# Altium PCB main.PcbDoc
Units mm, origin at the board's own origin, x right, y up, seen from the top; angles counter-clockwise.
Board outline 55 x 30 mm, 2 copper layers (L1 Copper top, L2 Copper bottom), stack 1.07 mm thick; 52 components, 22 nets, 136 pads, 89 vias.
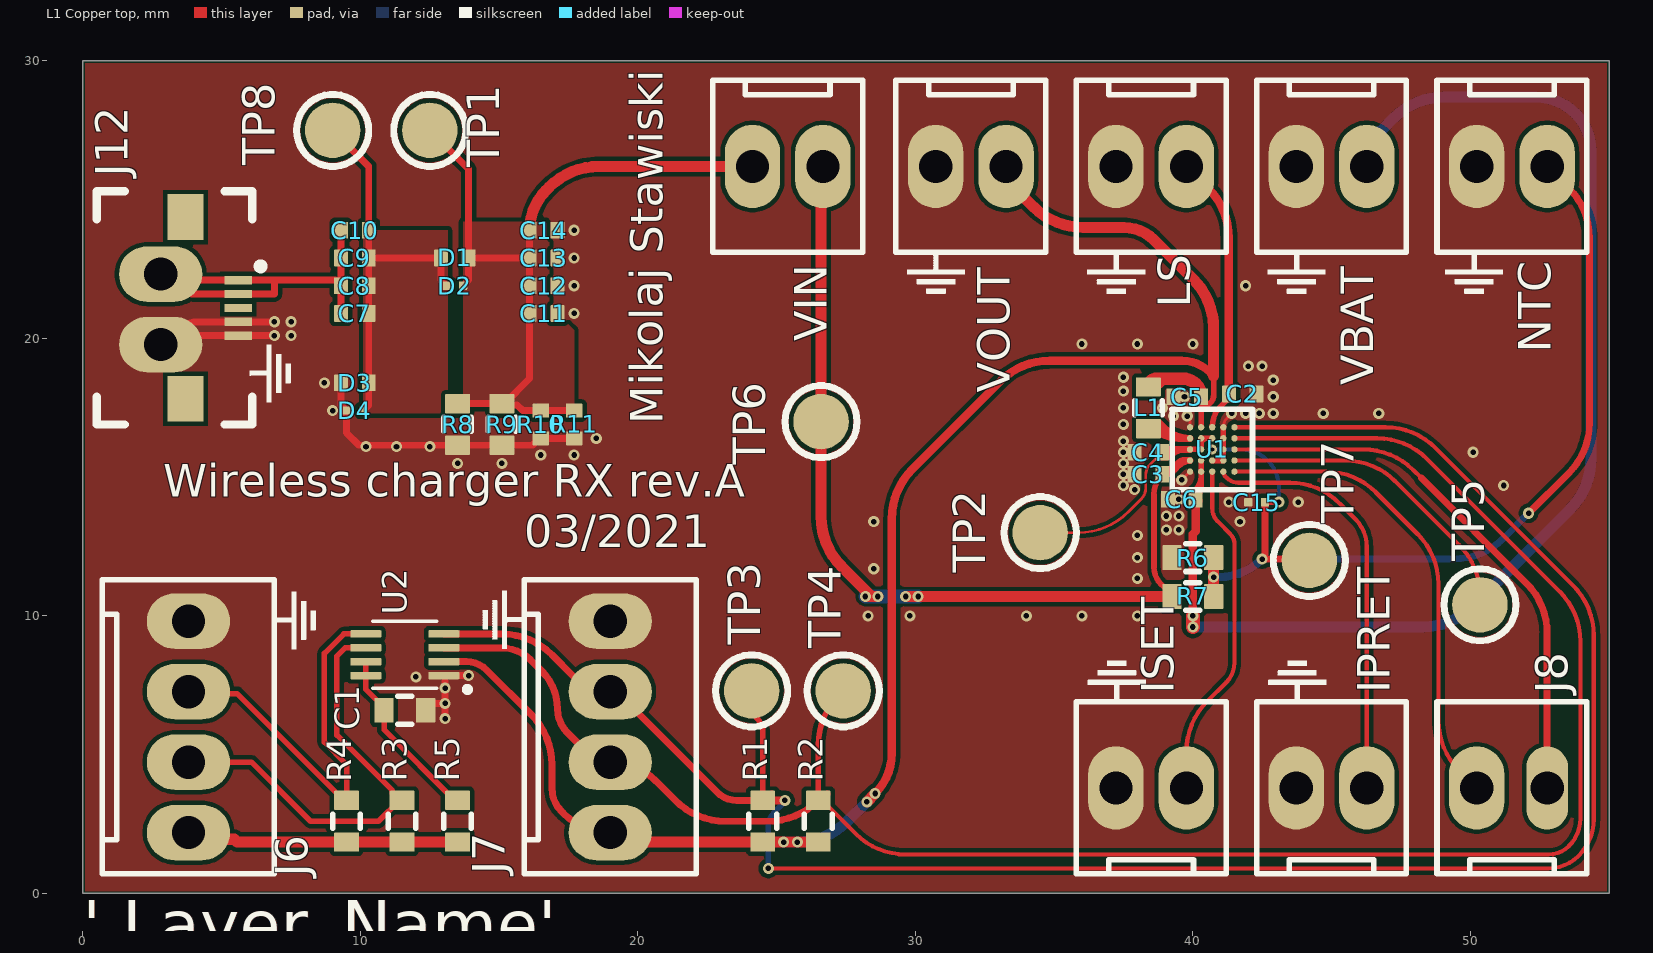
[diagram p0: L1 Copper top view]
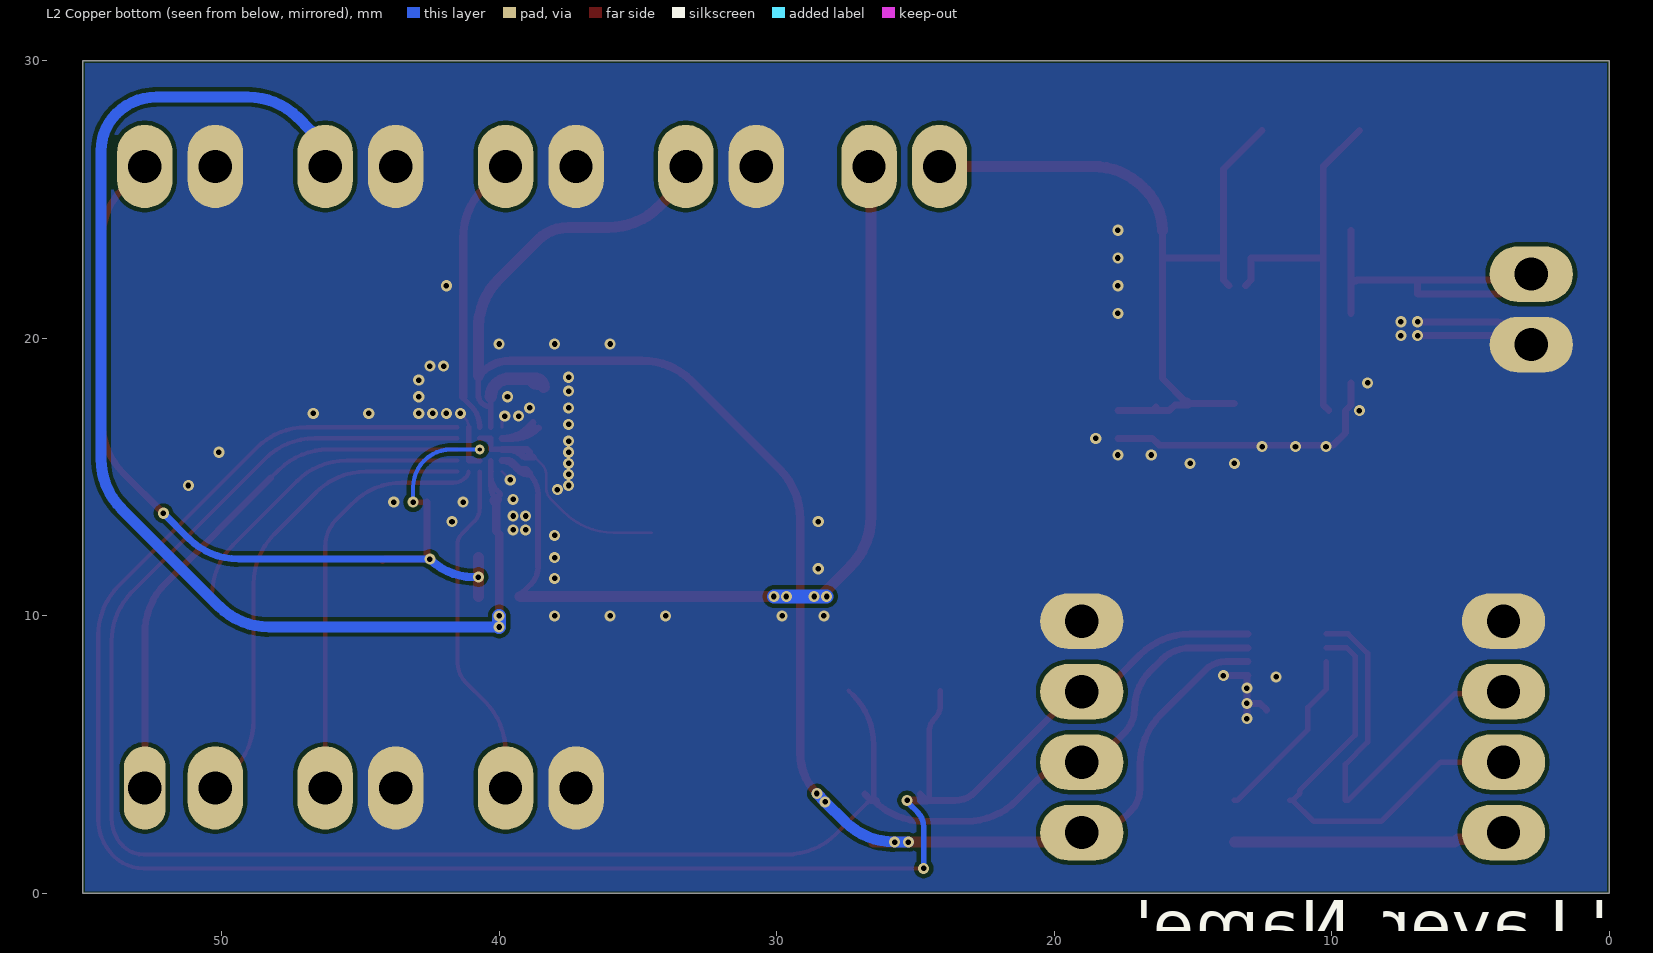
[diagram p1: L2 Copper bottom view, seen from below]

## Layer stack, top to bottom
Top Solder: solder mask 0.02, Solder Resist, Dk 3.5
L1 Copper top: signal copper 0.035
Dialectric FR4: dielectric 1, FR-4, Dk 4.8
L2 Copper bottom: signal copper 0.035
Bottom Solder: solder mask 0.02, Solder Resist, Dk 3.5

## Board outline
55,30 0,30 0,0 55,0

## Design rules (kind name [scope] priority, off if disabled: settings)
BoardOutlineClearance [All] p1: gap=0.076 ignorepadtopadclearanceinfootprint=FALSE
Clearance polygon_clearance [InPolygon] p1: gap=0.15 ignorepadtopadclearanceinfootprint=FALSE
Clearance [All] p2: gap=0.102 ignorepadtopadclearanceinfootprint=FALSE
HoleSize [All] p1: absolutevalues=TRUE maxlimit=3 minlimit=0.15 maxpercent=80.000 minpercent=20.000
HoleToHoleClearance [All] p1: gap=0 allowstackedmicrovias=FALSE
MinimumAnnularRing [All] p1: minimumring=0.1
MinimumSolderMaskSliver [All] p1: minsoldermaskwidth=0.025
PlaneClearance [All] p1: clearance=0.2
PlaneConnect [All] p1: planeconnectstyle=Relief reliefexpansion=0.15 reliefentries=4 reliefconductorwidth=0.1 reliefairgap=0.15
PolygonConnect [All] p1: connectstyle=Direct reliefconductorwidth=0.3 reliefentries=4 polygonreliefangle="90 Angle" airgapwidth=0.2
RoutingVias [All] p1: holewidth=0.15 width=0.4 viastyle="Through Hole" minholewidth=0.15 minwidth=0.3 maxholewidth=0.5 maxwidth=1.5
SilkToSilkClearance [All] p1: silktosilkclearance=0.05
SilkToSolderMaskClearance [IsPad] p1: minsilkscreentomaskgap=0 clearancetoexposedcopper=TRUE
SolderMaskExpansion [All] p1: expansion=0.102 istentingtop=FALSE
Width [All] p1: maxlimit=1 minlimit=0.051 preferedwidth=0.203 toplayer_prefwidth=0.076 bottomlayer_minwidth=0.102 minimp=50.000000 maximp=50.000000 favimp=50.000000
23 further rules are at their usual default settings.

## Components (designator, comment, footprint, x,y, rotation, side; value= is the part's Value field where it differs from the comment)
C1 "100nF" SMD_CAPACITOR_0603 11.6,6.6 r0 top
C2 "2.2uF" SMD_CAPACITOR_0402 41.8,18 r180 top
C3 "2.2uF" SMD_CAPACITOR_0402 38.4,15.1 r180 top
C4 "10uF" SMD_CAPACITOR_0402 38.4,15.9 r180 top
C5 "10uF" SMD_CAPACITOR_0402 39.8,17.9 r180 top
C6 "2.2uF" SMD_CAPACITOR_0402 39.6,14.2 r0 top
C7 "?" SMD_CAPACITOR_0402 9.8,20.9 r180 top
C8 "?" SMD_CAPACITOR_0402 9.8,21.9 r180 top
C9 "?" SMD_CAPACITOR_0402 9.8,22.9 r180 top
C10 "?" SMD_CAPACITOR_0402 9.8,23.9 r180 top
C11 "?" SMD_CAPACITOR_0402 16.6,20.9 r180 top
C12 "?" SMD_CAPACITOR_0402 16.6,21.9 r180 top
C13 "?" SMD_CAPACITOR_0402 16.6,22.9 r180 top
C14 "?" SMD_CAPACITOR_0402 16.6,23.9 r180 top
C15 "100nF" SMD_CAPACITOR_0201 42.3,14.1 r0 top
D1 "Fast Schottky 0402" CLP1006-2L 13.4,22.9 r0 top
D2 "Fast Schottky 0201" CLP0603-2M 13.4,21.9 r0 top
D3 "Fast Schottky 0402" CLP1006-2L 9.8,18.4 r0 top
D4 "Fast Schottky 0201" CLP0603-2M 9.8,17.4 r0 top
IPRET "" HEADER_2PIN_0022272021#1 45,3.8 r0 top
ISET "" HEADER_2PIN_0022272021#1 38.5,3.8 r0 top
J6 "I2C Translated" HEADER_4PIN_0022272041 3.8,6 r270 top
J7 "I2C 1V8" HEADER_4PIN_0022272041 19,6 r270 top
J8 "" HEADER_2PIN_0022272021#2 51.5,3.8 r0 top
J12 "Receiver Coil" FPC_5PIN_0545500571 5.6,21.1 r270 top
L1 "2.2uH" SMD_INDUCTOR_0603 38.4,17.5 r90 top
LS "LOAD SWITCH" HEADER_2PIN_0022272021#1 38.5,26.2 r180 top
NTC "NTC" HEADER_2PIN_0022272021#1 51.5,26.2 r180 top
R1 "10k" SMD_RESISTOR_0603 24.5,2.6 r270 top
R2 "10k" SMD_RESISTOR_0603 26.5,2.6 r270 top
R3 "1k" SMD_RESISTOR_0603 11.5,2.6 r270 top
R4 "1k" SMD_RESISTOR_0603 9.5,2.6 r270 top
R5 "200k" SMD_RESISTOR_0603 13.5,2.6 r270 top
R6 "10k" SMD_RESISTOR_0603 40,12.1 r180 top
R7 "10k" SMD_RESISTOR_0603 40,10.7 r0 top
R8 "?" SMD_RESISTOR_0603 13.5,16.9 r90 top
R9 "?" SMD_RESISTOR_0603 15.1,16.9 r90 top
R10 "?" SMD_RESISTOR_0402 16.5,16.9 r90 top
R11 "?" SMD_RESISTOR_0402 17.7,16.9 r90 top
TP1 "Testpoint" "Testpoint 2mm" 12.5,27.5 r0 top
TP2 "Testpoint" "Testpoint 2mm" 34.5,13 r0 top
TP3 "Testpoint" "Testpoint 2mm" 24.1,7.3 r0 top
TP4 "Testpoint" "Testpoint 2mm" 27.4,7.3 r0 top
TP5 "Testpoint" "Testpoint 2mm" 50.35,10.4 r0 top
TP6 "Testpoint" "Testpoint 2mm" 26.6,17 r0 top
TP7 "Testpoint" "Testpoint 2mm" 44.2,12 r0 top
TP8 "Testpoint" "Testpoint 2mm" 9,27.5 r0 top
U1 "BQ25125" BQ25125-DSBGA25 40.7,16 r90 top
U2 "LSF0102-Q1" 8-VSSOP 11.6,8.6 r180 top
VBAT "BATTERY" HEADER_2PIN_0022272021#1 45,26.2 r180 top
VIN "" HEADER_2PIN_0022272021#1 25.4,26.2 r180 top
VOUT "OUT" HEADER_2PIN_0022272021#1 32,26.2 r180 top

## Footprints (in the part's own frame and the unit in brackets; to place one, negate y for a bottom-side part, rotate by r counter-clockwise, add the part's x,y. Pads: shape width x height; smd on the part's side, far side on the other; paste and mask are expansions set on the pad)
8-VSSOP [mm] "8-VSSOP"
  rrect25% 1.12x0.27 smd: 1(-1.405,0.75) 2(-1.405,0.25) 3(-1.405,-0.25) 4(-1.405,-0.75) 5(1.405,-0.75) 6(1.405,-0.25) 7(1.405,0.25) 8(1.405,0.75)
  silkscreen extent -2.35,-1.2 1.15,1.35, body extent -1.55,-1 1.55,1, height 0.82
BQ25125-DSBGA25 [mm] "25-Pin DSBGA footprint for BQ25125"
  round 0.23 smd mask+0.05: A1(-0.8,0.8) A2(-0.4,0.8) A3(0,0.8) A4(0.4,0.8) A5(0.8,0.8) B1(-0.8,0.4) B2(-0.4,0.4) B3(0,0.4) B4(0.4,0.4) B5(0.8,0.4) C1(-0.8,0) C2(-0.4,0) C3(0,0) C4(0.4,0) C5(0.8,0) D1(-0.8,-0.4) D2(-0.4,-0.4) D3(0,-0.4) D4(0.4,-0.4) D5(0.8,-0.4) E1(-0.8,-0.8) E2(-0.4,-0.8) E3(0,-0.8) E4(0.4,-0.8) E5(0.8,-0.8)
  body extent -1.23,-1.26 1.23,1.27, height 0.5
CLP0603-2M [mm]
  rrect20% 0.3x0.3 smd paste-0.015 mask+0.06: 1(-0.3,0) 2(0.3,0)
  body extent -0.3,-0.15 0.31,0.16, height 0.27
CLP1006-2L [mm]
  rrect10% 0.5x0.6 smd paste-1 mask+0.06: 1(-0.5,0) 2(0.5,0)
  body extent -0.5,-0.3 0.51,0.31, height 0.27
FPC_5PIN_0545500571 [mm]
  rect 0.3x1 smd paste-0.06 mask+0.07: 1(-1,0) 2(-0.5,0) 3(0,0) 4(0.5,0) 5(1,0)
  rect 1.65x1.3 smd paste-0.2 mask+0: ""(-3.275,-1.9) ""(3.275,-1.9)
  silkscreen extent -4.2,-5.1 4.2,0.93, body extent -3.85,-4.8 3.85,0.2, height 1.2
HEADER_2PIN_0022272021#1 [mm]
  oval 2x3 hole 1.2: 1(-1.27,0) 2(1.27,0)
  silkscreen extent -2.7,-3.1 2.7,3.1, body extent -2.54,-2.9 2.54,2.9, height 11.7
HEADER_2PIN_0022272021#2 [mm]
  oval 2x3 hole 1.2: 1(-1.27,0)
  oval 1.5x3 hole 1.2: 2(1.27,0)
  silkscreen extent -2.7,-3.1 2.7,3.1, body extent -2.54,-2.9 2.54,2.9, height 11.7
HEADER_4PIN_0022272041 [mm]
  oval 2x3 hole 1.2: 1(-3.81,0) 2(-1.27,0) 3(1.27,0) 4(3.81,0)
  silkscreen extent -5.3,-3.1 5.3,3.1, body extent -5.08,-2.9 5.08,2.9, height 11.7
SMD_CAPACITOR_0201 [mm]
  rrect20% 0.3x0.3 smd paste-0.015 mask+0.06: 1(-0.3,0) 2(0.3,0)
  body extent -0.3,-0.15 0.3,0.15, height 0.3
SMD_CAPACITOR_0402 [mm]
  rrect10% 0.5x0.6 smd paste-1 mask+0.06: 1(-0.5,0) 2(0.5,0)
  body extent -0.5,-0.26 0.5,0.26, height 0.54
SMD_CAPACITOR_0603 [mm]
  rrect10% 0.7x0.9 smd paste-1 mask+0.08: 1(-0.75,0) 2(0.75,0)
  silkscreen extent -0.25,-0.5 0.25,0.5, body extent -0.8,-0.39 0.8,0.43, height 0.86
SMD_INDUCTOR_0603 [mm]
  rrect10% 0.7x0.9 smd paste-1 mask+0.06: 1(-0.75,0) 2(0.75,0)
  silkscreen extent -0.25,-0.5 0.25,0.5, body extent -0.8,-0.4 0.8,0.4, height 0.9
SMD_RESISTOR_0402 [mm]
  rrect10% 0.5x0.6 smd paste-1 mask+0.06: 1(-0.5,0) 2(0.5,0)
  body extent -0.5,-0.25 0.5,0.25, height 0.35
SMD_RESISTOR_0603 [mm]
  rrect10% 0.7x0.9 smd paste-1 mask+0.08: 1(-0.75,0) 2(0.75,0)
  silkscreen extent -0.25,-0.5 0.25,0.5, body extent -0.8,-0.39 0.8,0.41, height 0.45
"Testpoint 2mm" [mm]
  round 2 smd: 1(0,0)
  silkscreen extent -1.3,-1.3 1.3,1.3

## Part data
C1: library part CAPACITOR_0603, "Capacitor SMT 0603", Device Package="0603 (1608 Metric)", Mounting Type=SMT, Size / Dimension="0.063\" L x 0.031\" W (1.60mm x 0.80mm)"
C2 C3 C6: library part CAPACITOR_0402, "Ceramic Capacitor 2.2uF 20% 6.3V X5R 0402", Device Package="0402 (1005 Metric)", Manufacturer=Murata, Part Number=GRM155R60J225ME15D, Tolerance=20%, Voltage - Rated=6.3V, Distributor link 1=https://www.digikey.com.au/product-detail/en/murata-electronics/GRM155R60J225ME15D/490-4519-1-ND/1033278, Mounting Type=SMT, Size / Dimension="0.039\" L x 0.020\" W (1.00mm x 0.50mm)"
C4 C5: library part CAPACITOR_0402, "Ceramic Capacitor 10uF 20% 10V X5R 0402", Device Package="0402 (1005 Metric)", Manufacturer=Samsung, Part Number=CL05A106MP5NUNC, Tolerance=20%, Voltage - Rated=10V, Distributor link 1=https://www.digikey.com/en/products/detail/samsung-electro-mechanics/CL05A106MP5NUNC/3887108?s=N4IgTCBcDaIMIBkAMBWAggRiQNgLIAUUA5AVSLhAF0BfIA, Mounting Type=SMT, Size / Dimension="0.039\" L x 0.020\" W (1.00mm x 0.50mm)"
C7 C8 C9 C10 C11 C12 C13 C14: library part CAPACITOR_0402, "Ceramic Capacitor 10V X5R 0402", Device Package="0402 (1005 Metric)", Voltage - Rated=10V, Manufacturer=?, Mounting Type=SMT, Part Number=?, Size / Dimension="0.039\" L x 0.020\" W (1.00mm x 0.50mm)"
C15: library part CAPACITOR_0201, "Capacitor SMT 0201", Device Package="0201 (0603 Metric)", Mounting Type=SMT, Size / Dimension="0.024\" L x 0.012\" W (0.60mm x 0.30mm)"
D1 D3: library part DIODE_0402, "Diode SMT 0402", Device Package="0402 (1005 Metric)", Manufacturer=Vishay, Part Number=VSKY05301006, Distributor link 1=https://www.digikey.com/en/products/detail/vishay-general-semiconductor-diodes-division/VSKY05301006-G4-08/7390852, Mounting Type=SMT, Size / Dimension="0.039\" L x 0.020\" W (1.00mm x 0.50mm)"
D2 D4: library part DIODE_0201, "Diode SMT 0201", Device Package="0201 (0603 Metric)", Manufacturer=Vishay, Part Number=VSKY02300603, Distributor link 1=https://www.digikey.com/en/products/detail/vishay-general-semiconductor-diodes-division/VSKY02300603-G4-08/7390849, Mounting Type=SMT, Size / Dimension="0.024\" L x 0.012\" W (0.60mm x 0.30mm)"
IPRET ISET J8 LS NTC VBAT VIN VOUT: library part CONN_2PIN, "Connector 2-pin generic"
J6 J7: library part CONN_4PIN, "Connector 4-pin generic"
J12: library part CONN_FPC_5PIN, "FPC connector 5-pin generic"
L1: library part INDUCTOR_0603, "Inductor fixed 2.2uH 20% 500mA 180mOhm 0603", Device Package="0603 (1608 Metric)", Manufacturer=TDK, Part Number=MLZ1608N2R2LT000, Tolerance=20%, Distributor link 1=https://www.digikey.com.au/product-detail/en/tdk-corporation/MLZ1608N2R2LT000/445-6754-1-ND/2523575, Mounting Type=SMT, Size / Dimension="0.063\" L x 0.031\" W (1.60mm x 0.80mm)"
R1 R2 R3 R4 R5 R6 R7 R8 R9: library part RESISTOR_0603, "Resistor SMT 0603", Device Package="0603 (1608 Metric)", Mounting Type=SMT, Size / Dimension="0.063\" L x 0.031\" W (1.60mm x 0.80mm)"
R10 R11: library part RESISTOR_0402, "Resistor SMT 0402", Device Package="0402 (1005 Metric)", Mounting Type=SMT, Size / Dimension="0.039\" L x 0.020\" W (1.00mm x 0.50mm)"
TP1 TP2 TP3 TP4 TP5 TP6 TP7 TP8: "Testpoint for measuring at the PCB"
U1: "BQ25125 Low IQ Highly Integrated Battery Charge Management Solution For Wearables and IoT", Manufacturer=TI, Distributor link 1=https://www.digikey.com/en/products/detail/texas-instruments/BQ25125YFPR/10273214, Link=https://www.ti.com/product/BQ25125, Mounting Type=SMT, Part Number=BQ25125
U2: "Automotive 2-Channel Auto Bidirectional Multi-Voltage Level Translator", Device Package=8-VSSOP, Manufacturer=TI, Operating Temperature="-40°C ~ 125°C", Package / Case="8-VFSOP (0.091\"\", 2.30mm Width)", Part Number=LSF0102QDCURQ1, Distributor link 1=https://www.digikey.com/en/products/detail/texas-instruments/LSF0102QDCURQ1/9343347?s=N4IgTCBcDaIDIGUBiAGAjCsBFAIgYQFUAlLNEAXQF8g, Link=https://www.ti.com/product/LSF0102-Q1, Mounting Type=SMT

## Free pads (board coordinates)
  oval 3x2 hole 1.2: 1(2.8,22.32) 2(2.8,19.78)

## Via types
v1: diameter 0.4, hole 0.2, L1 Copper top to L2 Copper bottom, 88 vias
v2: diameter 0.356, hole 0.15, L1 Copper top to L2 Copper bottom, 1 vias

## Nets (pads, with @x,y where several pads share a name; then routed paths per layer and width w, separated by ;. In a path a pad name is that pad's centre, name@x,y a point inside that pad or via, vN(x,y) a via of type N, cw(c..) or ccw(c..) an arc to the next point about the centre after c; other vN are vias at no path point)
1V8: C5.1 J7.4 L1.2 R1.2 R2.2 U1.B5 U2.2 VOUT.1 | length 65.6
  L1 Copper top w0.1: L1.2 cw(c38.55,18.25) L1.2@38.55,18.4
  L1 Copper top w0.2: L1.2 38.65,18.25 ccw(c38.65,18.55) 38.95,18.55 ; U1.B5 40.3,17.559 ; C5.1 40.3,17.559 ; 40.75,18.65 40.75,17.95 cw(c40.388,17.95) 40.644,17.694 40.6,17.65 cw(c40.38,17.87) 40.38,17.559 40.3,17.559
  L1 Copper top w0.25: U2.2 13.826,8.35 cw(c13.826,7.326) 14.55,8.05 16.156,6.444 cw(c14.36,4.648) 16.9,4.648 16.9,3.795 ccw(c18.095,3.795) 17.25,2.95 17.31,2.89 ccw(c19,4.58) J7.4 J7.4@18.026,2.19
  L1 Copper top w0.3: v1(28.55,3.6) ccw(c27.101,5.049) 29.15,5.049 29.15,13.498 cw(c31.69,13.498) 29.894,15.294 33.056,18.456 cw(c34.852,16.66) 34.852,19.2 39.6,19.2 cw(c39.6,17.751) 40.624,18.776 40.75,18.65
  L1 Copper top w0.4: J7.4@19.29,1.9 J7.4 ccw(c19.821,3.011) 19.821,1.85 R1.2 v1(25.25,1.85) v1(25.75,1.85) R2.2 ; v1(28.25,3.3) v1(28.55,3.6) ; VOUT.1 ccw(c34.405,26.2) 33.602,25.398 34.256,24.744 ccw(c36.052,26.54) 36.052,24 37.514,24 cw(c37.514,22.464) 38.6,23.55 40.006,22.144 cw(c38.21,20.348) 40.75,20.348 40.75,18.65
  L1 Copper top w0.45: L1.2 cw(c38.7,18.25) 38.7,18.55 39.65,18.55 cw(c39.65,17.9) C5.1
  L2 Copper bottom w0.4: v1(25.25,1.85) v1(25.75,1.85) ccw(c25.75,4.385) 27.542,2.592 v1(28.25,3.3) v1(28.55,3.6)
GND: C1.2 C2.1 C3.2 C4.2 C5.2 C6.1 C11.1 C12.1 C13.1 C14.1 C15.1 D3.1 D4.1 IPRET.1 ISET.1 J6.1 J7.1 J12.4 J12.5 LS.2 NTC.2 pad.2 R6.2 R8.1 R9.1 R10.1 R11.1 U1.A1 U1.A5 U1.C2 U1.D2 U1.D3 U1.D4 U1.D5 U2.1 VBAT.2 VOUT.2 | length 24.9
  L1 Copper top w0.1: v1(39.6,14.9) U1.A1 ; v1(39.8,17.2) cw(c39.559,16.959) 39.9,16.959 U1.A5
  L1 Copper top w0.102: U1.D5 cw(c41.583,16.8) 41.241,17.141 v1(41.4,17.3)
  L1 Copper top w0.2: U1.C2 40.9,15.6 ; 41.1,15.8 cw(c40.9,15.8) 40.9,15.6 ; U1.D5 U1.D4 U1.D3 U1.D2 40.9,15.6
  L1 Copper top w0.25: v1(6.9,20.1) J12.5 3.62,20.1 ccw(c3.62,19.78) 3.3,19.78 cw(c4.12,19.78) 4.12,20.6 J12.4 v1(6.9,20.6) ; D3.1 9.3,17.6 D4.1 9.5,16.6 9.95,16.15 R8.1 R9.1 16.2,16.15 16.45,16.4 R10.1 R11.1 ; C1.2 12.35,6.625 12.575,6.85 v1(13.05,6.85) ; U2.1 U2.1@13.04,7.85 ; v1(13.05,6.3) v1(13.05,6.85) ; v1(13.9,7.85) U2.1@13.04,7.85 ; U2.1@13.04,7.85 13.05,7.84 v1(13.05,7.4) v1(13.05,6.85)
  other v1: 12,7.8 28.3,10 29.8,10 34,10 36,10 38,10 38,11.35 28.5,11.7 38,12.1 38,12.9 39.05,13.1 39.5,13.1 28.5,13.4 41.7,13.4 39.05,13.6 39.5,13.6 41.3,14.1 43.8,14.1 39.5,14.2 37.9,14.55 37.5,14.7 51.2,14.7 37.5,15.1 13.5,15.5 15.1,15.5 37.5,15.5 16.5,15.8 17.7,15.8 37.5,15.9 50.1,15.9 10.2,16.1 11.3,16.1 12.5,16.1 37.5,16.3 18.5,16.4 37.5,16.9 39.3,17.2 41.9,17.3 42.4,17.3 42.9,17.3 44.7,17.3 46.7,17.3 9,17.4 37.5,17.5 38.9,17.5 39.7,17.9 42.9,17.9 37.5,18.1 8.7,18.4 42.9,18.5 37.5,18.6 42,19 42.5,19 36,19.8 38,19.8 40,19.8 7.5,20.1 7.5,20.6 17.7,20.9 17.7,21.9 41.9,21.9 17.7,22.9 17.7,23.9
NetC1_1: C1.1 R5.1 U2.7 U2.8 | length 6.4
  L1 Copper top w0.2: U2.7 U2.8 10.195,7.355 10.85,6.7 C1.1 10.85,5.9 13.4,3.35 R5.1
NetC2_2: C2.2 LS.1 U1.C5 | length 10.1
  L1 Copper top w0.2: U1.C5 40.7,16.826 cw(c41.724,16.826) 41,17.55 41.265,17.815 ccw(c41.179,17.9) C2.2@41.3,17.9
  L1 Copper top w0.3: LS.1 40.556,25.414 cw(c38.76,23.618) 41.3,23.618 C2.2@41.3,17.9
NetC7_1: C7.1 C8.1 C9.1 C10.1 D1.1 D2.1 D3.2 D4.2 TP8.1 | length 14.4
  L1 Copper top w0.25: TP8.1 10.3,26.2 C10.1 C9.1 ; D4.2 10.3,17.6 D3.2 C7.1 C8.1 C9.1 ; D2.1 12.9,22.1 D1.1 C9.1
NetC7_2: C7.2 C8.2 C9.2 C10.2 J12.1 J12.2 pad.1 | length 13.7
  L1 Copper top w0.25: C7.2 C8.2 C8.2@9.3,21.95 ; C10.2 C9.2 C8.2@9.3,21.95 ; 6.9,22.1 6.9,21.6 J12.2 4.02,21.6 cw(c4.02,22.32) 3.3,22.32 ccw(c3.52,22.32) 3.52,22.1 J12.1 6.9,22.1 ; 6.9,22.1 9.1,22.1 9.125,22.075 9.175,22.075 C8.2@9.3,21.95
NetC11_2: C11.2 C12.2 C13.2 C14.2 D1.2 D2.2 R8.2 R9.2 R10.2 R11.2 TP1.1 VIN.2 | length 29
  L1 Copper top w0.25: TP1.1 13.9,26.1 D1.2 ; R8.2 R9.2 ; D2.2 13.9,22.1 D1.2 ; R9.2@15.2,17.65 16.1,18.55 C11.2 C12.2 C13.2 ; R9.2@15.2,17.75 R9.2 ; C14.2 C13.2 ; R10.2@16.325,17.525 R10.2@16.45,17.4 ; R11.2 R10.2 R10.2@16.45,17.4 ; D1.2 C13.2 ; R9.2 15.15,17.6 15.65,17.6 15.85,17.4 R10.2@16.45,17.4
  L1 Copper top w0.4: C14.2 cw(c18.152,23.9) 16.701,25.351 16.806,25.456 cw(c18.602,23.66) 18.602,26.2 VIN.2
NetC15_2: C15.2 NTC.1 R6.1 R7.2 TP7.1 U1.C3 | length 36.5
  L1 Copper top w0.1: R6.1 R6.1@40.75,12.2
  L1 Copper top w0.2: C15.2 v1(43.1,14.1)
  L1 Copper top w0.25: C15.2 42.6,12.291 cw(c42.259,12.291) v1(42.5,12.05) 44.079,12.05 cw(c44.079,11.879) TP7.1 ; v1(52.1,13.7) 53.556,15.156 ccw(c51.76,16.952) 54.3,16.952 54.3,23.618 ccw(c51.76,23.618) 53.556,25.414 NTC.1 ccw(c54.146,26.2) NTC.1@53.173,25.227
  L1 Copper top w0.4: R7.2 v1(40.75,11.4) R6.1
  L2 Copper bottom w0.15: v2(40.7,16) 41.734,16 cw(c41.734,14.634) 42.7,15.6 cw(c41.734,14.634) 43.1,14.634 v1(43.1,14.1)
  L2 Copper bottom w0.25: v1(42.5,12.05) 49.398,12.05 ccw(c49.398,14.59) 51.194,12.794 v1(52.1,13.7)
  L2 Copper bottom w0.3: v1(40.75,11.4) 40.931,11.4 ccw(c40.931,13.619) v1(42.5,12.05)
NetIPRET_2: IPRET.2 U1.D1 | length 15.2
  L1 Copper top w0.15: U1.D1 ccw(c41.341,15.2) 41.171,15.029 41.223,14.977 ccw(c41.65,15.404) 41.65,14.8 43.498,14.8 cw(c43.498,12.26) 45.294,14.056 45.85,13.5 cw(c44.836,12.486) 46.27,12.486 IPRET.2
NetISET_2: ISET.2 U1.C1 | length 12.2
  L1 Copper top w0.15: ISET.2 39.77,5.118 cw(c42.31,5.118) 40.514,6.914 41.206,7.606 ccw(c40.496,8.316) 41.5,8.316 41.5,12.6 ccw(c41.017,12.6) 41.359,12.941 40.9,13.4 cw(c41.383,13.883) 40.7,13.883 U1.C1
NetJ6_2: J6.2 R4.1 U2.5 | length 14.7
  L1 Copper top w0.2: J6.2 3.87,7.2 5.55,7.2 9.4,3.35 R4.1 9.5,4.65 8.7,5.45 8.7,8.65 9.4,9.35 U2.5
NetJ6_3: J6.3 R3.1 U2.6 | length 16.2
  L1 Copper top w0.2: J6.3 6.07,4.73 8.2,2.6 10.65,2.6 R3.1@11.4,3.35 ; U2.6 9.45,8.85 9.15,8.55 9.15,5.7 11.15,3.7 11.15,3.6 R3.1@11.4,3.35 ; R3.1 R3.1@11.4,3.35
NetJ6_4: J6.4 R3.2 R4.2 R5.2 | length 9.8
  L1 Copper top w0.4: J6.4 4.04,1.95 5.45,1.95 5.55,1.85 R4.2 R3.2 R5.2
NetJ7_2: J7.2 R1.1 TP3.1 U1.E5 U2.4 | length 76.5
  L1 Copper top w0.15: R1.1 R1.1@24.6,3.35 ; v1(24.7,0.9) 25.7,0.9 52.814,0.9 ccw(c52.814,2.436) 53.9,1.35 ccw(c52.572,2.678) 54.45,2.678 54.45,9.298 ccw(c51.91,9.298) 53.706,11.094 48.744,16.056 ccw(c46.948,14.26) 46.948,16.8 U1.E5
  L1 Copper top w0.2: J7.2@18.5,7.27 J7.2 ; TP3.1 24.1,6.783 ccw(c24.783,6.783) 24.3,6.3 cw(c23.817,5.817) 24.5,5.817 R1.1
  L1 Copper top w0.25: U2.4 15.098,9.35 cw(c15.098,6.81) 16.894,8.606 17.686,7.814 ccw(c19,9.129) J7.2 ; J7.2@19.335,6.935 J7.2 ; J7.2@19.392,7.108 ccw(c19,6.715) J7.2 ; J7.2@19.393,7.107 22.862,3.638 ccw(c23.557,4.333) 23.557,3.35 R1.1 24.6,3.35 R1.1@24.825,3.575
  L1 Copper top w0.3: R1.1@24.6,3.35 v1(25.3,3.35)
  L2 Copper bottom w0.2: v1(24.7,0.9) 24.7,2.4 cw(c25.424,2.4) 24.912,2.912 25.265,3.265 ccw(c25.179,3.35) v1(25.3,3.35)
NetJ7_3: J7.3 R2.1 TP4.1 U1.E4 U2.3 | length 74.7
  L1 Copper top w0.15: R2.1 cw(c26.5,2.988) 26.756,3.244 27.856,2.144 ccw(c29.652,3.94) 29.652,1.4 52.826,1.4 ccw(c52.826,2.424) 53.55,1.7 ccw(c52.545,2.705) 53.966,2.705 53.966,9.082 ccw(c51.426,9.082) 53.222,10.878 48.444,15.656 ccw(c46.648,13.86) 46.648,16.4 U1.E4 ; TP4.1@27.244,7.144 TP4.1
  L1 Copper top w0.2: J7.3@18.07,4.73 J7.3 ; R2.1 26.5,5.348 cw(c29.04,5.348) TP4.1@27.244,7.144
  L1 Copper top w0.25: U2.3 15.064,8.85 cw(c15.064,7.314) 16.15,8.4 16.534,8.016 cw(c15.169,6.65) 17.1,6.65 ccw(c18.307,6.65) 17.453,5.797 18.181,5.069 ccw(c19,5.889) J7.3 ; J7.3@18.607,4.893 ccw(c19,5.285) J7.3 ; J7.3@19.785,4.73 J7.3 ; R2.1@26.4,3.35 R2.1 ; R2.1@26.825,3.575 26.6,3.35 R2.1 ; J7.3 cw(c19,2.388) 20.656,4.044 21.356,3.344 ccw(c23.152,5.14) 23.152,2.6 24.698,2.6 ccw(c24.698,5.14) 26.494,3.344 R2.1
NetJ8_1: J8.1 U1.E1 | length 17.2
  L1 Copper top w0.15: U1.E1 42.557,15.2 44.798,15.2 cw(c44.798,12.66) 46.594,14.456 48.106,12.944 cw(c46.31,11.148) 48.85,11.148 48.85,6.232 ccw(c51.39,6.232) 49.594,4.436 J8.1
NetJ8_2: J8.2 U1.E3 | length 20
  L1 Copper top w0.15: U1.E3 46.148,16 cw(c46.148,13.46) 47.944,15.256 48.236,14.964
  L1 Copper top w0.25: 48.236,14.964 52.026,11.174 cw(c50.23,9.378) 52.77,9.378 J8.2
NetTP5_1: TP5.1 U1.E2 | length 11.6
  L1 Copper top w0.15: U1.E2 45.498,15.6 cw(c45.498,13.06) 47.294,14.856 49.606,12.544 cw(c47.81,10.748) 50.35,10.748 TP5.1
PMID: C4.1 TP2.1 U1.A3 U1.B3 U1.B4 U1.C4 | length 9.8
  L1 Copper top w0.102: TP2.1 35.875,13 ccw(c35.875,15.54) 37.671,13.744 38.151,14.224 ccw(c37.783,14.592) 38.303,14.592 38.303,15.088 cw(c38.824,15.088) 38.456,15.456 C4.1
  L1 Copper top w0.15: C4.1@38.725,15.675 38.9,15.85 C4.1
  L1 Copper top w0.2: U1.A3 U1.B3 40.3,16.2 ; U1.C4 40.5,16.4 ; 40.3,16.2 cw(c40.5,16.2) 40.5,16.4 ; 40.3,16.2 U1.B4 40.5,16.4
  L1 Copper top w0.25: C4.1@38.777,15.726 39.021,15.726 ccw(c39.021,15.979) 39.2,15.8 cw(c39.683,15.317) 39.683,16 ; C4.1 39,16 39.683,16 ; U1.A3 39.683,16
SW: L1.1 U1.A4 | length 3.7
  L1 Copper top w0.25: L1.1@38.589,16.77 ccw(c39.483,17.663) 39.483,16.4 39.658,16.4 ; L1.1@38.731,16.784 ccw(c39.658,17.71) 39.658,16.4 ; L1.1@38.781,16.969 38.962,16.789 ccw(c39.9,17.727) U1.A4 39.658,16.4
VBAT: C6.2 U1.B1 U1.B2 VBAT.1 | length 46.2
  L1 Copper top w0.1: U1.B1@40.295,15.205 U1.B1
  L1 Copper top w0.2: C6.2@39.956,14.344 cw(c40.105,14.344) 39.999,14.449 40.1,14.55 ccw(c39.617,15.033) 40.3,15.033 ; C6.2 ccw(c39.617,14.683) 40.3,14.683 40.3,15.033 ; U1.B1@40.295,15.205 40.3,15.21 U1.B2 ; U1.B1 40.3,15.033
  L1 Copper top w0.3: v1(40,10) 40,12.95 40.1,13.05 C6.2
  L1 Copper top w0.4: C6.2 C6.2@40.15,14.15
  L1 Copper top w0.5: v1(40,9.6) v1(40,10)
  L2 Copper bottom w0.4: v1(40,9.6) 48.298,9.6 ccw(c48.298,12.14) 50.094,10.344 53.606,13.856 ccw(c51.81,15.652) 54.35,15.652 54.35,26.772 ccw(c52.472,26.772) 53.8,28.1 ccw(c52.351,26.651) 52.351,28.7 49.052,28.7 ccw(c49.052,26.16) 47.256,27.956 46.814,27.514 ccw(c48.129,26.2) VBAT.1
  L2 Copper bottom w0.5: v1(40,9.6) v1(40,10)
VIN: C3.1 R7.1 TP6.1 U1.A2 VIN.1 | length 35.9
  L1 Copper top w0.15: 39.18,15.275 39.449,15.543 cw(c39.701,15.291) 39.701,15.648
  L1 Copper top w0.152: C3.1@38.9,15.05 C3.1 ; R7.1@39.179,10.871 cw(c39.009,10.7) R7.1
  L1 Copper top w0.2: C3.1 ccw(c39.624,14.376) 38.6,14.376 38.6,11.754 ccw(c39.454,11.754) 38.85,11.15 R7.1@39.215,10.785 ; R7.1@39.215,10.785 cw(c39.129,10.7) R7.1
  L1 Copper top w0.25: VIN.1@26.585,26.115 VIN.1 ; 39.336,15.275 cw(c38.913,15.697) 38.913,15.1 C3.1 38.9,15.15 39.025,15.275 39.18,15.275 39.336,15.275 ; 39.336,15.275 39.492,15.431 ; 39.492,15.431 cw(c39.9,15.022) U1.A2 39.661,15.6 39.492,15.431
  L1 Copper top w0.4: VIN.1@26.585,26.115 cw(c26.549,26.079) 26.6,26.079 TP6.1 26.6,13.577 ccw(c29.14,13.577) 27.344,11.781 28.425,10.7 ; v1(28.2,10.7) 28.425,10.7 ; v1(28.65,10.7) 28.425,10.7 ; v1(29.65,10.7) v1(30.1,10.7) R7.1
  L2 Copper bottom w0.5: v1(28.2,10.7) v1(28.65,10.7) v1(29.65,10.7) v1(30.1,10.7)
pads on no net: J12. J12.3

## Polygon pours and split planes (outlines as drawn)
GND on L1 Copper top "GND_L01_P005" (solid, remove dead copper, pour order 5): 0,30 55,30 55,0 0,0
NetC7_1 on L1 Copper top "NETC7_1_L01_P003" (solid, remove dead copper, pour order 3): 10.3,23.9 13.15,23.9 13.15,17.3 10.2,17.3 10.1,17.4 10.1,23.7
NetC11_2 on L1 Copper top "NETC11_2_L01_P001" (solid, remove dead copper, pour order 1): 13.7,17.6 15.65,17.6 15.85,17.4 17.7,17.4 17.7,20.3 17.1,20.9 17.1,23.9 16.8,24.2 13.7,24.2
GND on L2 Copper bottom "GND_L02_P000" (solid, remove dead copper, pour order 0): 0,30 55,30 55,0 0,0

## Other copper
L1 Copper top:
  pour cut-out: 39.9,16.8 41.5,16.8 41.5,15.2 39.9,15.2
  text "'.Layer_Name'" at 0.002,-2.581 h3
L2 Copper bottom:
  text "'.Layer_Name'" at 0.002,-2.581 h3

## Silkscreen, mask and mechanical layers (free items; w line width, h text height)
Top Overlay:
  drawing of 31 lines, arcs and shapes, not listed
  text "Mikolaj Stawiski" at 21.3,16.901 h2 r90
  text "Wireless charger RX rev.A" at 2.9,13.9 h2
  text "03/2021" at 15.9,12.079 h2
  text "'.Layer_Name'" at 0,-2.581 h3
Bottom Overlay:
  text "'.Layer_Name'" at 0.002,-2.581 h3
Top Paste:
  text "'.Layer_Name'" at 0,-2.581 h3
Bottom Paste:
  text "'.Layer_Name'" at 0.002,-2.981 h3
Top Solder:
  text "'.Layer_Name'" at 0,-2.581 h3
Bottom Solder:
  text "'.Layer_Name'" at 0.002,-2.981 h3
M1 Board Outline:
  the board outline again, w0.2
  text "'.Layer_Name'" at 0.002,-2.981 h3
Fab Notes (Mech4):
  lines w0.025: 48.159,6.494 49.931,8.266 52.931,11.266 55.931,14.266 ; 48.159,7.994 48.431,8.266 51.431,11.266 54.431,14.266 55.931,15.766 ; 48.159,9.494 49.931,11.266 52.931,14.266 55.931,17.266 ; 48.159,10.994 48.431,11.266 51.431,14.266 54.431,17.266 55.931,18.766 ; 48.159,12.494 49.931,14.266 52.931,17.266 55.931,20.266 ; 48.159,13.994 48.431,14.266 51.431,17.266 54.431,20.266 55.931,21.766 ; 48.159,15.494 49.931,17.266 52.931,20.266 55.931,23.266 ; 48.159,16.994 48.431,17.266 51.431,20.266 54.431,23.266 55.931,24.766 ; 48.159,18.494 49.931,20.266 52.931,23.266 55.931,26.266 ; 48.159,19.994 48.431,20.266 51.431,23.266 54.431,26.266 ; 48.159,21.494 49.931,23.266 52.931,26.266 ; 48.159,22.994 48.431,23.266 51.431,26.266 ; 48.159,24.494 49.931,26.266 ; 48.159,25.994 48.431,26.266 ; 48.431,5.266 51.431,8.266 54.431,11.266 55.931,12.766 ; 49.931,5.266 52.931,8.266 55.931,11.266 ; 51.431,5.266 54.431,8.266 55.931,9.766 ; 52.931,5.266 55.931,8.266 ; 54.431,5.266 55.931,6.766
  lines w0.3: 0.15,8.266 6.429,8.266 19.991,8.266 30.902,8.266 39.864,8.266 48.159,8.266 55.931,8.266 ; 0.15,11.266 6.429,11.266 19.991,11.266 30.902,11.266 39.864,11.266 48.159,11.266 55.931,11.266 ; 0.15,14.266 6.429,14.266 19.991,14.266 30.902,14.266 39.864,14.266 48.159,14.266 55.931,14.266 ; 0.15,17.266 6.429,17.266 19.991,17.266 30.902,17.266 39.864,17.266 48.159,17.266 55.931,17.266 ; 0.15,20.266 6.429,20.266 19.991,20.266 30.902,20.266 39.864,20.266 48.159,20.266 55.931,20.266 ; 0.15,23.266 6.429,23.266 19.991,23.266 30.902,23.266 39.864,23.266 48.159,23.266 55.931,23.266 ; 0.15,26.266 55.931,26.266 ; 6.429,29.266 6.429,5.266 ; 19.991,29.266 19.991,5.266 ; 30.902,29.266 30.902,5.266 ; 39.864,29.266 39.864,5.266 ; 48.159,29.266 48.159,5.266 ; 6.429,5.266 0.15,5.266 0.15,29.266 55.931,29.266 55.931,5.266 48.159,5.266 ; 6.429,5.266 19.991,5.266 ; 19.991,5.266 30.902,5.266 ; 30.902,5.266 39.864,5.266 ; 39.864,5.266 48.159,5.266
  text "Layer" at 1.65,27.016 h1.5
  text "Name" at 7.929,27.016 h1.5
  text "Material" at 21.491,27.016 h1.5
  text "Thickness" at 32.402,27.016 h1.5
  text "Constant" at 41.364,27.016 h1.5
  text "Rigid 2L" at 49.659,27.016 h1.5
  text "Top Overlay" at 7.929,24.016 h1.5
  text "Top Solder" at 7.929,21.016 h1.5
  text "Solder Resist" at 21.491,21.016 h1.5
  text "0.020mm" at 32.402,21.016 h1.5
  text "3.5" at 41.364,21.016 h1.5
  text "1" at 1.65,18.016 h1.5
  text "L1 Copper top" at 7.929,18.016 h1.5
  text "Copper" at 21.491,18.016 h1.5
  text "0.035mm" at 32.402,18.016 h1.5
  text "Dialectric FR4" at 7.929,15.016 h1.5
  text "FR-4" at 21.491,15.016 h1.5
  text "1.000mm" at 32.402,15.016 h1.5
  text "4.8" at 41.364,15.016 h1.5
  text "2" at 1.649,12.016 h1.5
  text "L2 Copper bottom" at 7.929,12.016 h1.5
  text "Copper" at 21.491,12.016 h1.5
  text "0.035mm" at 32.402,12.016 h1.5
  text "Bottom Solder" at 7.929,9.016 h1.5
  text "Solder Resist" at 21.491,9.016 h1.5
  text "0.020mm" at 32.402,9.016 h1.5
  text "3.5" at 41.364,9.016 h1.5
  text "Bottom Overlay" at 7.929,6.016 h1.5
  text "Total board thickness:" at 1.65,3.016 h1.5
  text "1.110mm" at 32.402,3.016 h1.5
  text "'.Layer_Name'" at 0.002,-2.981 h3
Top 3D Body:
  text "'.Layer_Name'" at 0,-2.581 h3
Bottom 3D Body:
  text "'.Layer_Name'" at 0.002,-2.581 h3
Top Assembly:
  text "'.Layer_Name'" at 0,-2.581 h3
Bottom Assembly:
  text "'.Layer_Name'" at 0.002,-2.581 h3
Drill Drawing:
  circle w0.254: c-7.865,46.14 r0.691
  lines w0.254: -8.556,40.613 -7.174,40.613 -7.865,39.232 -8.556,40.613 ; -8.556,42.34 -7.174,42.34 -7.174,43.722 -8.556,43.722 -8.556,42.34
  lines w0.381: -9.81,38.299 122.302,38.299 ; -9.81,47.625 122.302,47.625 ; -1.827,35.191 -1.827,50.733 ; 5.394,35.191 5.394,50.733 ; 19.131,35.191 19.131,50.733 ; 25.323,35.191 25.323,50.733 ; 34.332,35.191 34.332,50.733 ; 56.46,35.191 56.46,50.733 ; 63.844,35.191 63.844,50.733 ; 73.491,35.191 73.491,50.733 ; 81.965,35.191 81.965,50.733 ; 91.654,35.191 91.654,50.733 ; 106.714,35.191 106.714,50.733 ; -9.81,35.191 122.302,35.191 122.302,50.733 -9.81,50.733 -9.81,35.191
  text "Symbol" at -7.944,48.557 h1.8
  text "Count" at -0.894,48.557 h1.8
  text "Hole Size" at 6.327,48.557 h1.8
  text "Plated" at 20.064,48.557 h1.8
  text "Hole Type" at 26.255,48.557 h1.8
  text "Drill Layer Pair" at 35.265,48.557 h1.8
  text "Via/Pad" at 57.393,48.557 h1.8
  text "Pad Shape" at 64.776,48.557 h1.8
  text "Template" at 74.423,48.557 h1.8
  text "Description" at 82.898,48.557 h1.8
  text "Hole Tolerance (+)" at 92.586,48.557 h1.8
  text "Hole Tolerance (-)" at 107.647,48.557 h1.8
  text "1" at -0.894,45.449 h1.5
  text "5.91mil (0.150mm)" at 6.327,45.449 h1.5
  text "PTH" at 20.064,45.449 h1.5
  text "Round" at 26.255,45.449 h1.5
  text "L1 Copper top - L2 Copper bottom" at 35.265,45.449 h1.5
  text "Via" at 57.393,45.449 h1.5
  text "Rounded" at 64.776,45.449 h1.5
  text "v36h15" at 74.423,45.449 h1.5
  text "26" at -0.894,42.34 h1.5
  text "47.24mil (1.200mm)" at 6.327,42.34 h1.5
  text "PTH" at 20.064,42.34 h1.5
  text "Round" at 26.255,42.34 h1.5
  text "L1 Copper top - L2 Copper bottom" at 35.265,42.34 h1.5
  text "Pad" at 57.393,42.34 h1.5
  text "Rounded" at 64.776,42.34 h1.5
  text "(Mixed)" at 74.423,42.34 h1.5
  text "88" at -0.894,39.232 h1.5
  text "7.87mil (0.200mm)" at 6.327,39.232 h1.5
  text "PTH" at 20.064,39.232 h1.5
  text "Round" at 26.255,39.232 h1.5
  text "L1 Copper top - L2 Copper bottom" at 35.265,39.232 h1.5
  text "Via" at 57.393,39.232 h1.5
  text "Rounded" at 64.776,39.232 h1.5
  text "v40h20" at 74.423,39.232 h1.5
  text "115 Total" at -0.894,36.123 h1.5